# EAGLE board belsekolah_kecil (EAGLE 5.11)
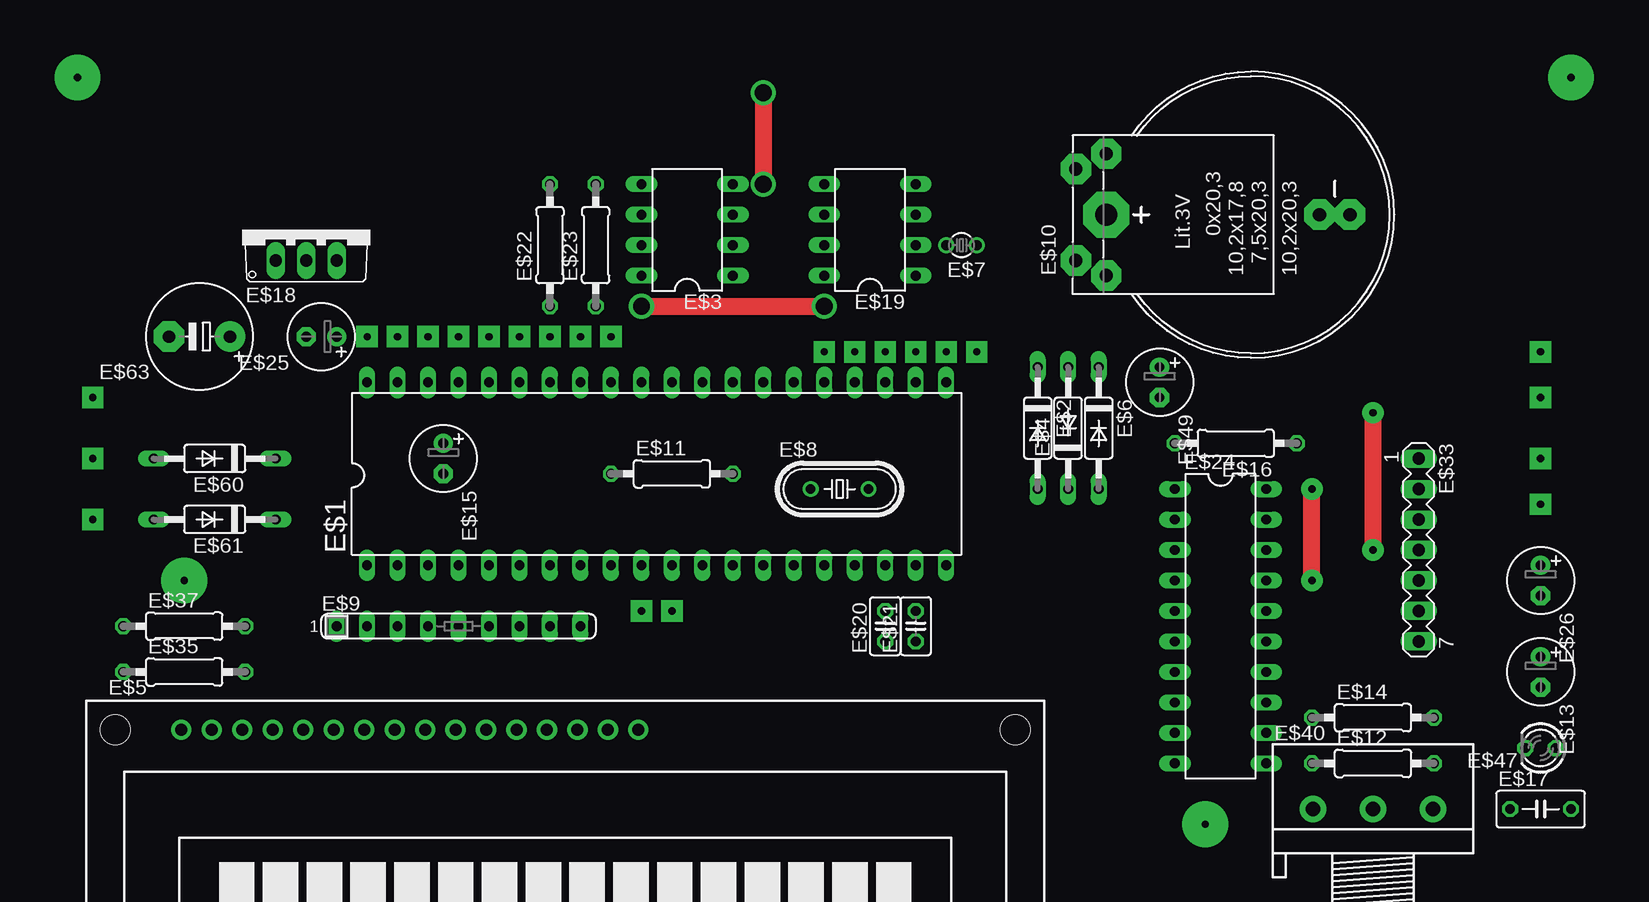
[diagram p0: board, top side]
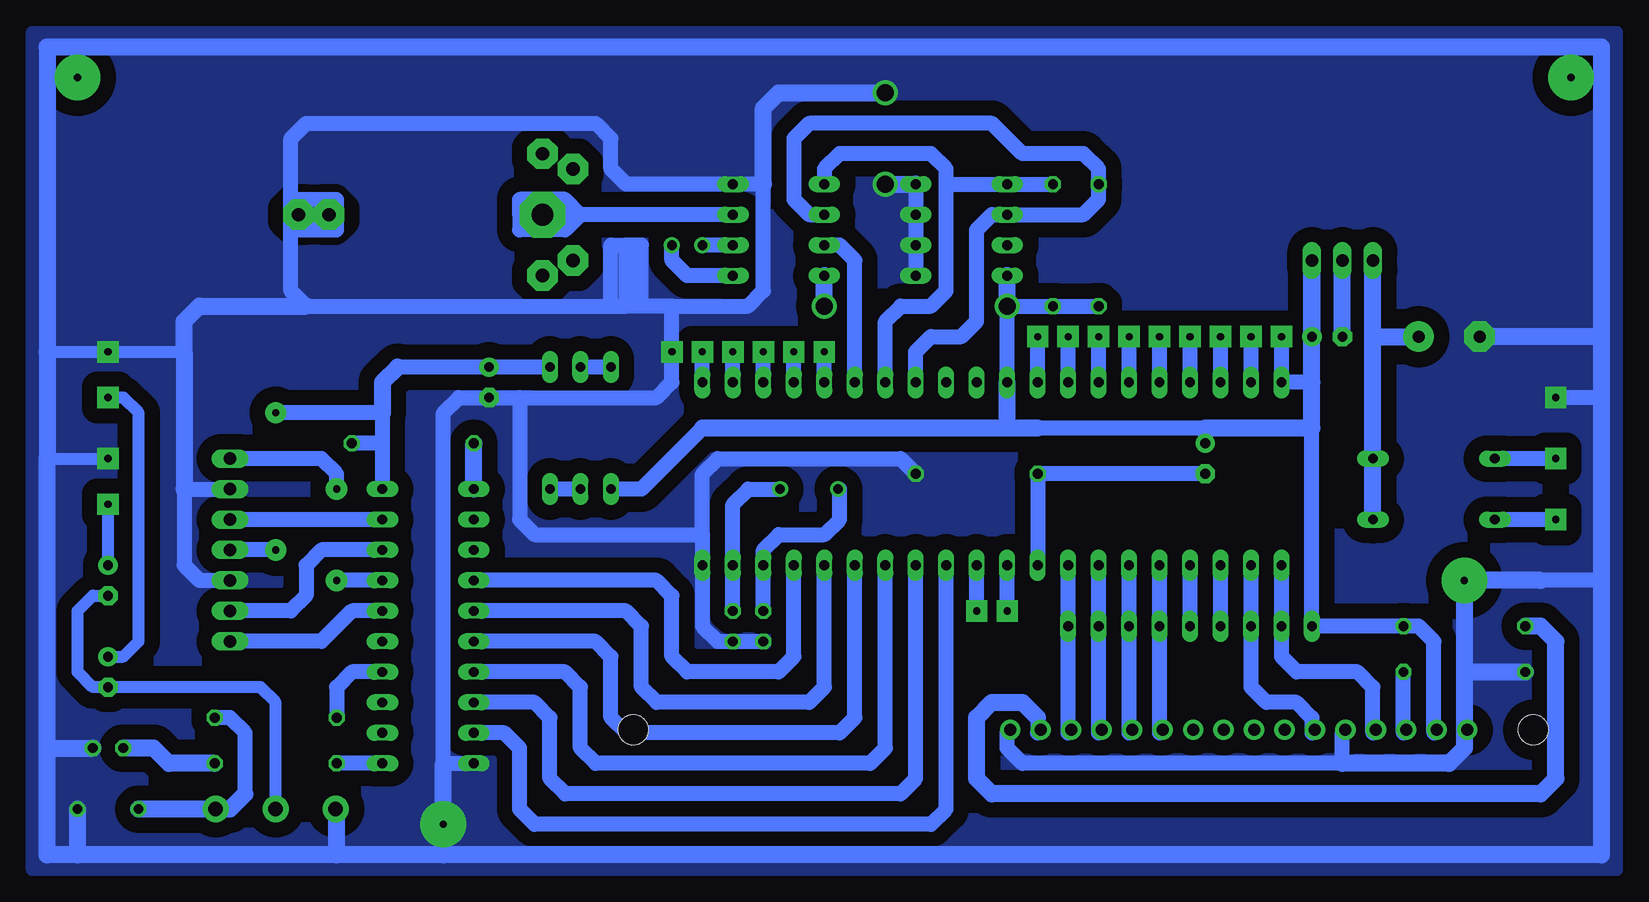
[diagram p1: board, bottom side, seen from below]

No outline drawn. Coordinates in mm, seen from the top.
Copper layers (1*16): Top 0.035mm / dielectric 1.5mm / Bottom 0.035mm
Design rules "default": minimum track width 10mil, minimum drill 24mil, track to track 8mil, track to pad 8mil, pad to pad 8mil, via to via 8mil, smd to smd 8mil, copper to edge 40mil, drill to drill 8mil, minimum pad ring 10mil, minimum via ring 8mil, stop-mask expansion 4mil, vias tented up to drill 0mil, thermal gap 10mil

## Footprints (pad centres in the part's own frame; a part is rotated, then mirrored left to right if it is on the bottom)
DIL40 = drill 0.813 long: 1 -24.13,-7.62; 2 -21.59,-7.62; 3 -19.05,-7.62; 4 -16.51,-7.62; 5 -13.97,-7.62; 6 -11.43,-7.62; 7 -8.89,-7.62; 8 -6.35,-7.62; 9 -3.81,-7.62; 10 -1.27,-7.62; 11 1.27,-7.62; 12 3.81,-7.62; 13 6.35,-7.62; 14 8.89,-7.62; 15 11.43,-7.62; 16 13.97,-7.62; 17 16.51,-7.62; 18 19.05,-7.62; 19 21.59,-7.62; 20 24.13,-7.62; 21 24.13,7.62; 22 21.59,7.62; 23 19.05,7.62; 24 16.51,7.62; 25 13.97,7.62; 26 11.43,7.62; 27 8.89,7.62; 28 6.35,7.62; 29 3.81,7.62; 30 1.27,7.62; 31 -1.27,7.62; 32 -3.81,7.62; 33 -6.35,7.62; 34 -8.89,7.62; 35 -11.43,7.62; 36 -13.97,7.62; 37 -16.51,7.62; 38 -19.05,7.62; 39 -21.59,7.62; 40 -24.13,7.62
C2992 = drill 0.813 long: A 5.08,0; C -5.08,0
DIL08 = drill 0.813 long: 1 -3.81,-3.81; 2 -1.27,-3.81; 3 1.27,-3.81; 4 3.81,-3.81; 5 3.81,3.81; 6 1.27,3.81; 7 -1.27,3.81; 8 -3.81,3.81
TUXGR_16X2_R2 = drill 1 pad 1.676 round: 1 -32,15.5; 2 -29.46,15.5; 3 -26.92,15.5; 4 -24.38,15.5; 5 -21.84,15.5; 6 -19.3,15.5; 7 -16.76,15.5; 8 -14.22,15.5; 9 -11.68,15.5; 10 -9.14,15.5; 11 -6.6,15.5; 12 -4.06,15.5; 13 -1.52,15.5; 14 1.02,15.5; 15 3.56,15.5; 16 6.1,15.5 | hole 2.5: -37.5,-15.5; 37.5,-15.5; -37.5,15.5; 37.5,15.5
TC26V = drill 0.813 round: 1 -1.27,0; 2 1.27,0
HC49/S = drill 0.813 round: 1 -2.413,0; 2 2.413,0
SIL9 = drill 0.813 long: 1 -10.16,0; 2 -7.62,0; 3 -5.08,0; 4 -2.54,0; 5 0,0; 6 2.54,0; 7 5.08,0; 8 7.62,0; 9 10.16,0
B2430UNI = drill 1.118 pad 2.54 octagon: + 3.81,14.605; +@1 -3.81,14.605; +@2 -5.08,12.065; +@3 5.08,12.065; - 0,-5.715; -@1 0,-8.255 | drill 1.803 pad 3.81 octagon: +@4 0,12.065
0207/10 = drill 0.813 octagon: 1 -5.08,0; 2 5.08,0
E2,5-6 = drill 0.813 pad 1.6 round: + -1.27,0 | drill 0.813 pad 1.6 octagon: - 1.27,0
C050-030X075 = drill 0.813 octagon: 1 -2.54,0; 2 2.54,0
TO220V = drill 1.016 long: 1 -2.54,-2.54; 2 0,-2.54; 3 2.54,-2.54
C025-025X050 = drill 0.813 octagon: 1 -1.27,0; 2 1.27,0
DIL20 = drill 0.813 long: 1 -11.43,-3.81; 2 -8.89,-3.81; 3 -6.35,-3.81; 4 -3.81,-3.81; 5 -1.27,-3.81; 6 1.27,-3.81; 7 3.81,-3.81; 8 6.35,-3.81; 9 8.89,-3.81; 10 11.43,-3.81; 11 11.43,3.81; 12 8.89,3.81; 13 6.35,3.81; 14 3.81,3.81; 15 1.27,3.81; 16 -1.27,3.81; 17 -3.81,3.81; 18 -6.35,3.81; 19 -8.89,3.81; 20 -11.43,3.81
MA07-1 = drill 1.016 long: 1 -7.62,0; 2 -5.08,0; 3 -2.54,0; 4 0,0; 5 2.54,0; 6 5.08,0; 7 7.62,0
3RP/1610N = drill 1.2 pad 2.184 round: 1 -5,0; 2 0,0; 3 5,0
LED3MM = drill 0.813 octagon: A -1.27,0; K 1.27,0
E5-8,5 = drill 1.016 pad 2.54 round: + -2.54,0 | drill 1.016 pad 2.54 octagon: - 2.54,0

## Placement (x,y rotation side)
E$1  [DIL40]  59.69,52.07 0 top
E$2  [C2992]  91.44,55.88 270 top
E$3  [DIL08]  62.23,72.39 90 top
E$4  [C2992]  93.98,55.88 90 top
E$5  [TUXGR_16X2_R2]  52.07,15.24 0 top
E$6  [C2992]  96.52,55.88 270 top
E$7  [TC26V]  85.09,71.12 180 top
E$8  [HC49/S]  74.93,50.8 0 top
E$9  [SIL9]  43.18,39.37 0 top
E$10  [B2430UNI]  109.22,73.66 90 top
E$11  [0207/10]  60.96,52.07 0 top
E$12  [0207/10]  119.38,27.94 0 top
E$13  [E2,5-6]  133.35,35.56 270 top
E$14  [0207/10]  119.38,31.75 0 top
E$15  [E2,5-6]  41.91,53.34 270 top
E$16  [0207/10]  107.95,54.61 180 top
E$17  [C050-030X075]  133.35,24.13 0 top
E$18  [TO220V]  30.48,72.39 0 top
E$19  [DIL08]  77.47,72.39 90 top
E$20  [C025-025X050]  78.74,39.37 90 top
E$21  [C025-025X050]  81.28,39.37 90 top
E$22  [0207/10]  50.8,71.12 90 top
E$23  [0207/10]  54.61,71.12 90 top
E$24  [DIL20]  106.68,39.37 270 top
E$25  [E2,5-6]  31.75,63.5 180 top
E$26  [E2,5-6]  133.35,43.18 270 top
E$33  [MA07-1]  123.19,45.72 270 top
E$35  [0207/10]  20.32,35.56 0 top
E$37  [0207/10]  20.32,39.37 0 top
E$40  [3RP/1610N]  119.38,24.13 0 top
E$47  [LED3MM]  133.35,29.21 180 top
E$49  [E2,5-6]  101.6,59.69 270 top
E$60  [C2992]  22.86,53.34 180 top
E$61  [C2992]  22.86,48.26 180 top
E$63  [E5-8,5]  21.59,63.5 180 top

## Library data of the parts
E$1 E$3 E$19 E$24 = ic-package
E$2 E$4 E$6 E$60 E$61 = diode
E$5 = display-lcd
E$7 E$8 = crystal
E$9 = resistor-sil
E$10 = battery
E$11-E$17 E$20-E$23 E$25 E$26 E$35 E$37 E$49 E$63 = resistor
E$18 = transistor
E$33 = con-lstb
E$40 = pot
E$47 = led

## Nets
GND: E$1.20 E$3.1 E$3.2 E$3.3 E$3.4 E$11.2 E$17.2 E$19.4 E$20.1 E$21.1 E$24.10 E$33.2 E$33.5 E$35.1 E$47.A E$49.- E$63.-
S$1: E$1.19 E$21.2
S$2: E$1.18 E$20.2
S$3: E$1.9 E$11.1 E$15.-
S$4: E$1.1 E$9.2
S$5: E$1.2 E$9.3
S$6: E$37.1
S$7: E$1.26 E$19.7
S$8: E$1.3 E$9.4
S$9: E$1.4 E$9.5
S$10: E$1.5 E$9.6
S$11: E$1.6 E$9.7
S$12: E$1.7 E$9.8
S$13: E$1.8 E$9.9
S$14: E$7.2 E$19.2
S$15: E$35.2
S$16: E$1.31 E$1.40 E$2.A E$3.8 E$9.1 E$15.+ E$18.3 E$19.8 E$22.1 E$23.1 E$25.+ E$37.2
S$17: E$7.1 E$19.1
S$18: E$19.3
S$19: E$1.27 E$3.5 E$19.5 E$23.2
S$20: E$2.C E$4.A
S$21: E$4.C E$6.A
S$22: E$1.28 E$3.6 E$19.6 E$22.2
S$23: E$12.1 E$24.11
S$24: E$1.17 E$24.4
S$25: E$1.16 E$24.5
S$26: E$18.2 E$25.-
S$27: E$1.15 E$24.6
S$28: E$1.14 E$24.7
S$29: E$1.13 E$24.8
S$30: E$1.12 E$24.9
S$31: E$6.C E$24.20 E$33.4 E$49.+
S$32: E$14.1 E$24.14
S$33: E$14.2 E$17.1
S$34: E$18.1 E$60.C E$61.C E$63.+
S$35: E$12.2 E$47.K
S$36: E$1.21
S$37: E$24.1
S$38: E$1.22
S$39: E$24.19 E$33.3
S$40: E$24.18 E$33.6
S$41: E$1.23
S$42: E$24.16 E$33.7
S$43: E$24.17 E$33.1
S$44: E$1.24
S$45: E$1.25
S$46: E$1.10
S$47: E$1.11
S$48: E$1.32
S$49: E$1.33
S$50: E$1.34
S$51: E$1.35
S$52: E$1.36
S$53: E$1.37
S$54: E$1.38
S$55: E$1.39
S$56: E$60.A
S$57: E$61.A
S$59: E$26.+
S$63: E$13.- E$26.- E$40.2
S$64: E$13.+

## Tracks (layer width: path | path; a pad name or v marks a point on that pad's centre or on a via)
GND  (via drill 0.6 pad 1.78, 0.6 pad 3.81, 1.4)
  Top 1.422: v68.58,83.82 v68.58,76.2
  Bottom 1.016: 138.43,62.23 v133.35,62.23 127,62.23 | 138.43,53.34 v133.35,53.34
  Bottom 1.27: E$3.1 E$3.2 E$3.3 E$3.4 | 118.11,74.93 114.3,74.93 114.3,73.66 | 118.11,74.93 118.11,80.01 116.84,81.28 92.71,81.28 91.44,80.01 91.44,77.47 90.17,76.2 E$19.4 78.74,76.2 78.74,67.31 80.01,66.04 86.36,66.04 | E$33.5 125.73,43.18 127,44.45 127,50.8 E$33.2 | 114.3,73.66 114.3,72.39 118.11,72.39 | 118.11,73.66 114.3,73.66 | 118.11,73.66 118.11,74.93 | 118.11,72.39 118.11,73.66 | E$20.1 E$21.1 82.55,38.1 83.82,39.37 E$1.20 83.82,46.99 | E$11.2 67.31,53.34 82.55,53.34 83.82,52.07 83.82,46.99 | 118.11,72.39 118.11,67.31 116.84,66.04 91.44,66.04 | 91.44,66.04 91.44,71.12 90.17,71.12 | 90.17,66.04 90.17,71.12 | 91.44,66.04 90.17,66.04 | 90.17,71.12 88.9,71.12 88.9,66.04 | 88.9,66.04 90.17,66.04 | 86.36,66.04 88.9,66.04 | 83.82,46.99 97.79,46.99 99.06,48.26 99.06,58.42 | 58.42,30.48 58.42,29.21 57.15,27.94 30.48,27.94 30.48,30.48 | 99.06,58.42 87.63,58.42 86.36,59.69 v86.36,62.23 86.36,66.04 | 99.06,58.42 E$49.- 104.14,58.42 105.41,57.15 105.41,27.94 E$24.10 | 105.41,20.32 v105.41,22.86 | 8.89,43.18 13.97,43.18 | 8.89,58.42 v12.7,58.42
  Bottom 1.422: v68.58,76.2 E$3.4 | 127,50.8 127,62.23 127,64.77 125.73,66.04 116.84,66.04 | v68.58,83.82 77.47,83.82 78.74,82.55 78.74,76.2 | 30.48,27.94 21.59,27.94 20.32,29.21 20.32,35.56 | 20.32,35.56 E$35.1 | v105.41,22.86 105.41,27.94 | 114.3,20.32 114.3,24.13 | 20.32,35.56 20.32,41.91 19.05,43.18 13.97,43.18 | 114.3,20.32 105.41,20.32 8.89,20.32 8.89,43.18 8.89,58.42 8.89,63.5 | 135.89,20.32 E$17.2 | 114.3,20.32 135.89,20.32 | 135.89,20.32 138.43,20.32 138.43,29.21 | 8.89,63.5 E$63.- | 8.89,63.5 8.89,87.63 138.43,87.63 138.43,62.23 138.43,53.34 138.43,29.21 | 138.43,29.21 E$47.A
  pour Bottom (isolate 1.27, no thermals): 7.62,88.9 7.62,19.05 139.7,19.05 139.7,88.9
S$1
  Bottom 1.27: 77.47,50.8 80.01,50.8 81.28,49.53 E$1.19 E$21.2
S$2
  Bottom 1.27: 72.39,50.8 72.39,48.26 73.66,46.99 77.47,46.99 78.74,45.72 E$1.18 E$20.2
S$3
  Bottom 1.27: E$1.9 E$11.1 E$15.-
S$4
  Bottom 1.27: E$1.1 E$9.2 35.56,36.83 34.29,35.56 29.21,35.56 27.94,34.29 27.94,30.48
S$5
  Bottom 1.27: E$1.2 E$9.3 38.1,34.29 36.83,33.02 34.29,33.02 33.02,31.75 33.02,30.48
S$6
  Bottom 1.27: 55.88,31.75 55.88,30.48
  Bottom 1.422: E$37.1 13.97,39.37 12.7,38.1 12.7,26.67 13.97,25.4 59.69,25.4 60.96,26.67 60.96,31.75 59.69,33.02 57.15,33.02 55.88,31.75
S$7
  Bottom 1.27: E$19.7 72.39,71.12 71.12,69.85 E$1.26
S$8
  Bottom 1.27: E$9.4 E$1.3
S$9
  Bottom 1.27: E$9.5 E$1.4
S$10
  Bottom 1.27: E$1.5 E$9.6 45.72,30.48
S$11
  Bottom 1.27: E$1.6 E$9.7 48.26,30.48
S$12
  Bottom 1.27: E$1.7 E$9.8 50.8,30.48
S$13
  Bottom 1.27: E$1.8 E$9.9 53.34,30.48
S$14
  Bottom 1.27: E$19.2 E$7.2
S$15
  Bottom 1.27: 25.4,30.48 E$35.2
S$16  (via drill 0.6 pad 1.78, 1.4)
  Top 1.422: v58.42,66.04 v73.66,66.04
  Bottom 1.27: E$22.1 E$23.1 v58.42,66.04 E$1.31 | E$2.A 88.9,50.8 83.82,55.88 | 55.88,55.88 41.91,55.88 E$15.+ | 33.02,55.88 E$9.1 E$37.2 24.13,39.37 22.86,38.1 22.86,30.48 | v35.56,63.5 E$1.40 33.02,59.69
  Bottom 1.422: v73.66,66.04 E$19.8 | v58.42,66.04 E$3.8 | 58.42,55.88 83.82,55.88 | 58.42,55.88 E$1.31 | 55.88,55.88 58.42,55.88 | E$25.+ E$18.3 33.02,59.69 33.02,55.88 41.91,55.88
S$17
  Bottom 1.27: E$19.1 85.09,68.58 86.36,69.85 E$7.1
S$18
  Bottom 1.27: E$19.3 93.98,73.66 | 93.98,73.66 99.06,73.66 | 99.06,73.66 99.06,74.93 95.25,74.93 93.98,73.66 | 93.98,73.66 95.25,72.39 99.06,72.39 99.06,73.66
S$19
  Bottom 1.27: E$1.27 68.58,64.77 67.31,66.04 64.77,66.04 63.5,67.31 63.5,76.2 | 63.5,76.2 63.5,77.47 64.77,78.74 72.39,78.74 73.66,77.47 E$19.5 | E$23.2 E$3.5 63.5,76.2
S$20
  Bottom 1.27: E$2.C E$4.A
S$21
  Bottom 1.27: E$4.C E$6.A
S$22
  Bottom 1.27: E$1.28 66.04,62.23 64.77,63.5 62.23,63.5 60.96,64.77 60.96,72.39 59.69,73.66 E$3.6 52.07,73.66 50.8,74.93 E$22.2 50.8,77.47 52.07,78.74 57.15,78.74 59.69,81.28 74.93,81.28 76.2,80.01 76.2,74.93 74.93,73.66 E$19.6
S$23
  Bottom 1.27: E$24.11 E$12.1
S$24
  Bottom 1.27: E$1.17 76.2,36.83 77.47,35.56 85.09,35.56 86.36,36.83 86.36,41.91 87.63,43.18 E$24.4
S$25
  Bottom 1.27: E$1.16 73.66,34.29 74.93,33.02 87.63,33.02 88.9,34.29 88.9,39.37 90.17,40.64 E$24.5
S$26
  Bottom 1.422: E$25.- E$18.2
S$27
  Bottom 1.27: E$1.15 71.12,31.75 72.39,30.48 90.17,30.48 91.44,31.75 91.44,36.83 92.71,38.1 E$24.6
S$28
  Bottom 1.27: E$1.14 68.58,29.21 69.85,27.94 92.71,27.94 93.98,29.21 93.98,34.29 95.25,35.56 E$24.7
S$29
  Bottom 1.27: E$1.13 66.04,26.67 67.31,25.4 95.25,25.4 96.52,26.67 96.52,31.75 97.79,33.02 E$24.8
S$30
  Bottom 1.27: E$1.12 63.5,24.13 64.77,22.86 97.79,22.86 99.06,24.13 99.06,29.21 100.33,30.48 E$24.9
S$31  (via drill 0.6 pad 1.78)
  Top 1.422: v119.38,57.15 v119.38,45.72
  Bottom 1.27: E$6.C E$49.+ 109.22,60.96 | v119.38,45.72 E$33.4 | v119.38,57.15 110.49,57.15 110.49,54.61 | 110.49,54.61 113.03,54.61 | 110.49,54.61 E$24.20
  Bottom 1.422: 109.22,60.96 110.49,59.69 110.49,57.15
S$32
  Bottom 1.27: E$14.1 114.3,34.29 113.03,35.56 E$24.14
S$33
  Bottom 1.27: E$14.2 123.19,31.75 121.92,30.48 121.92,25.4
  Bottom 1.422: 121.92,25.4 123.19,24.13 E$17.1
S$34
  Bottom 1.422: E$61.C E$60.C 27.94,63.5 | 27.94,63.5 E$18.1 | 27.94,63.5 E$63.+
S$35
  Bottom 1.422: E$12.2 128.27,27.94 129.54,29.21 E$47.K
S$36  (via drill 0.6 pad 1.78)
  Bottom 1.27: E$1.21 v83.82,62.23
S$37
  Bottom 1.422: E$24.1 102.87,54.61
S$38  (via drill 0.6 pad 1.78)
  Bottom 1.27: E$1.22 v81.28,62.23
S$39
  Bottom 1.27: E$24.19 E$33.3
S$40
  Bottom 1.27: E$24.18 115.57,45.72 116.84,44.45 116.84,41.91 118.11,40.64 E$33.6
S$41  (via drill 0.6 pad 1.78)
  Bottom 1.27: E$1.23 v78.74,62.23
S$42
  Bottom 1.27: E$24.16 113.03,40.64 115.57,38.1 E$33.7
S$43  (via drill 0.6 pad 1.78)
  Top 1.422: v114.3,43.18 v114.3,50.8
  Bottom 1.27: E$24.17 v114.3,43.18 | E$33.1 115.57,53.34 114.3,52.07 v114.3,50.8
S$44  (via drill 0.6 pad 1.78)
  Bottom 1.27: E$1.24 v76.2,62.23
S$45  (via drill 0.6 pad 1.78)
  Bottom 1.27: E$1.25 v73.66,62.23
S$46  (via drill 0.6 pad 1.78)
  Bottom 1.27: v58.42,40.64 E$1.10
S$47  (via drill 0.6 pad 1.78)
  Bottom 1.27: v60.96,40.64 E$1.11
S$48  (via drill 0.6 pad 1.78)
  Bottom 1.27: E$1.32 v55.88,63.5
S$49  (via drill 0.6 pad 1.78)
  Bottom 1.27: E$1.33 v53.34,63.5
S$50  (via drill 0.6 pad 1.78)
  Bottom 1.27: E$1.34 v50.8,63.5
S$51  (via drill 0.6 pad 1.78)
  Bottom 1.27: E$1.35 v48.26,63.5
S$52  (via drill 0.6 pad 1.78)
  Bottom 1.27: E$1.36 v45.72,63.5
S$53  (via drill 0.6 pad 1.78)
  Bottom 1.27: E$1.37 v43.18,63.5
S$54  (via drill 0.6 pad 1.78)
  Bottom 1.27: E$1.38 v40.64,63.5
S$55  (via drill 0.6 pad 1.78)
  Bottom 1.27: E$1.39 v38.1,63.5
S$56  (via drill 0.6 pad 1.78)
  Bottom 1.27: v12.7,53.34 E$60.A
S$57  (via drill 0.6 pad 1.78)
  Bottom 1.27: v12.7,48.26 E$61.A
S$58  (via drill 0.6 pad 3.81)
  other vias: 11.43,85.09
S$59  (via drill 0.6 pad 1.78)
  Bottom 1.016: E$26.+ v133.35,49.53
S$60  (via drill 0.6 pad 3.81)
  other vias: 135.89,85.09
S$61  (via drill 0.6 pad 3.81)
  other vias: 20.32,43.18
S$63
  Bottom 1.016: E$26.- 134.62,41.91 135.89,40.64 135.89,35.56 134.62,34.29 E$13.- 120.65,34.29 119.38,33.02 E$40.2
S$64  (via drill 0.6 pad 1.78)
  Bottom 1.016: E$13.+ 132.08,36.83 130.81,38.1 130.81,57.15 132.08,58.42 v133.35,58.42